# EAGLE board PT_2015_PB_MAIN_Rev1 (EAGLE 6.5.0)
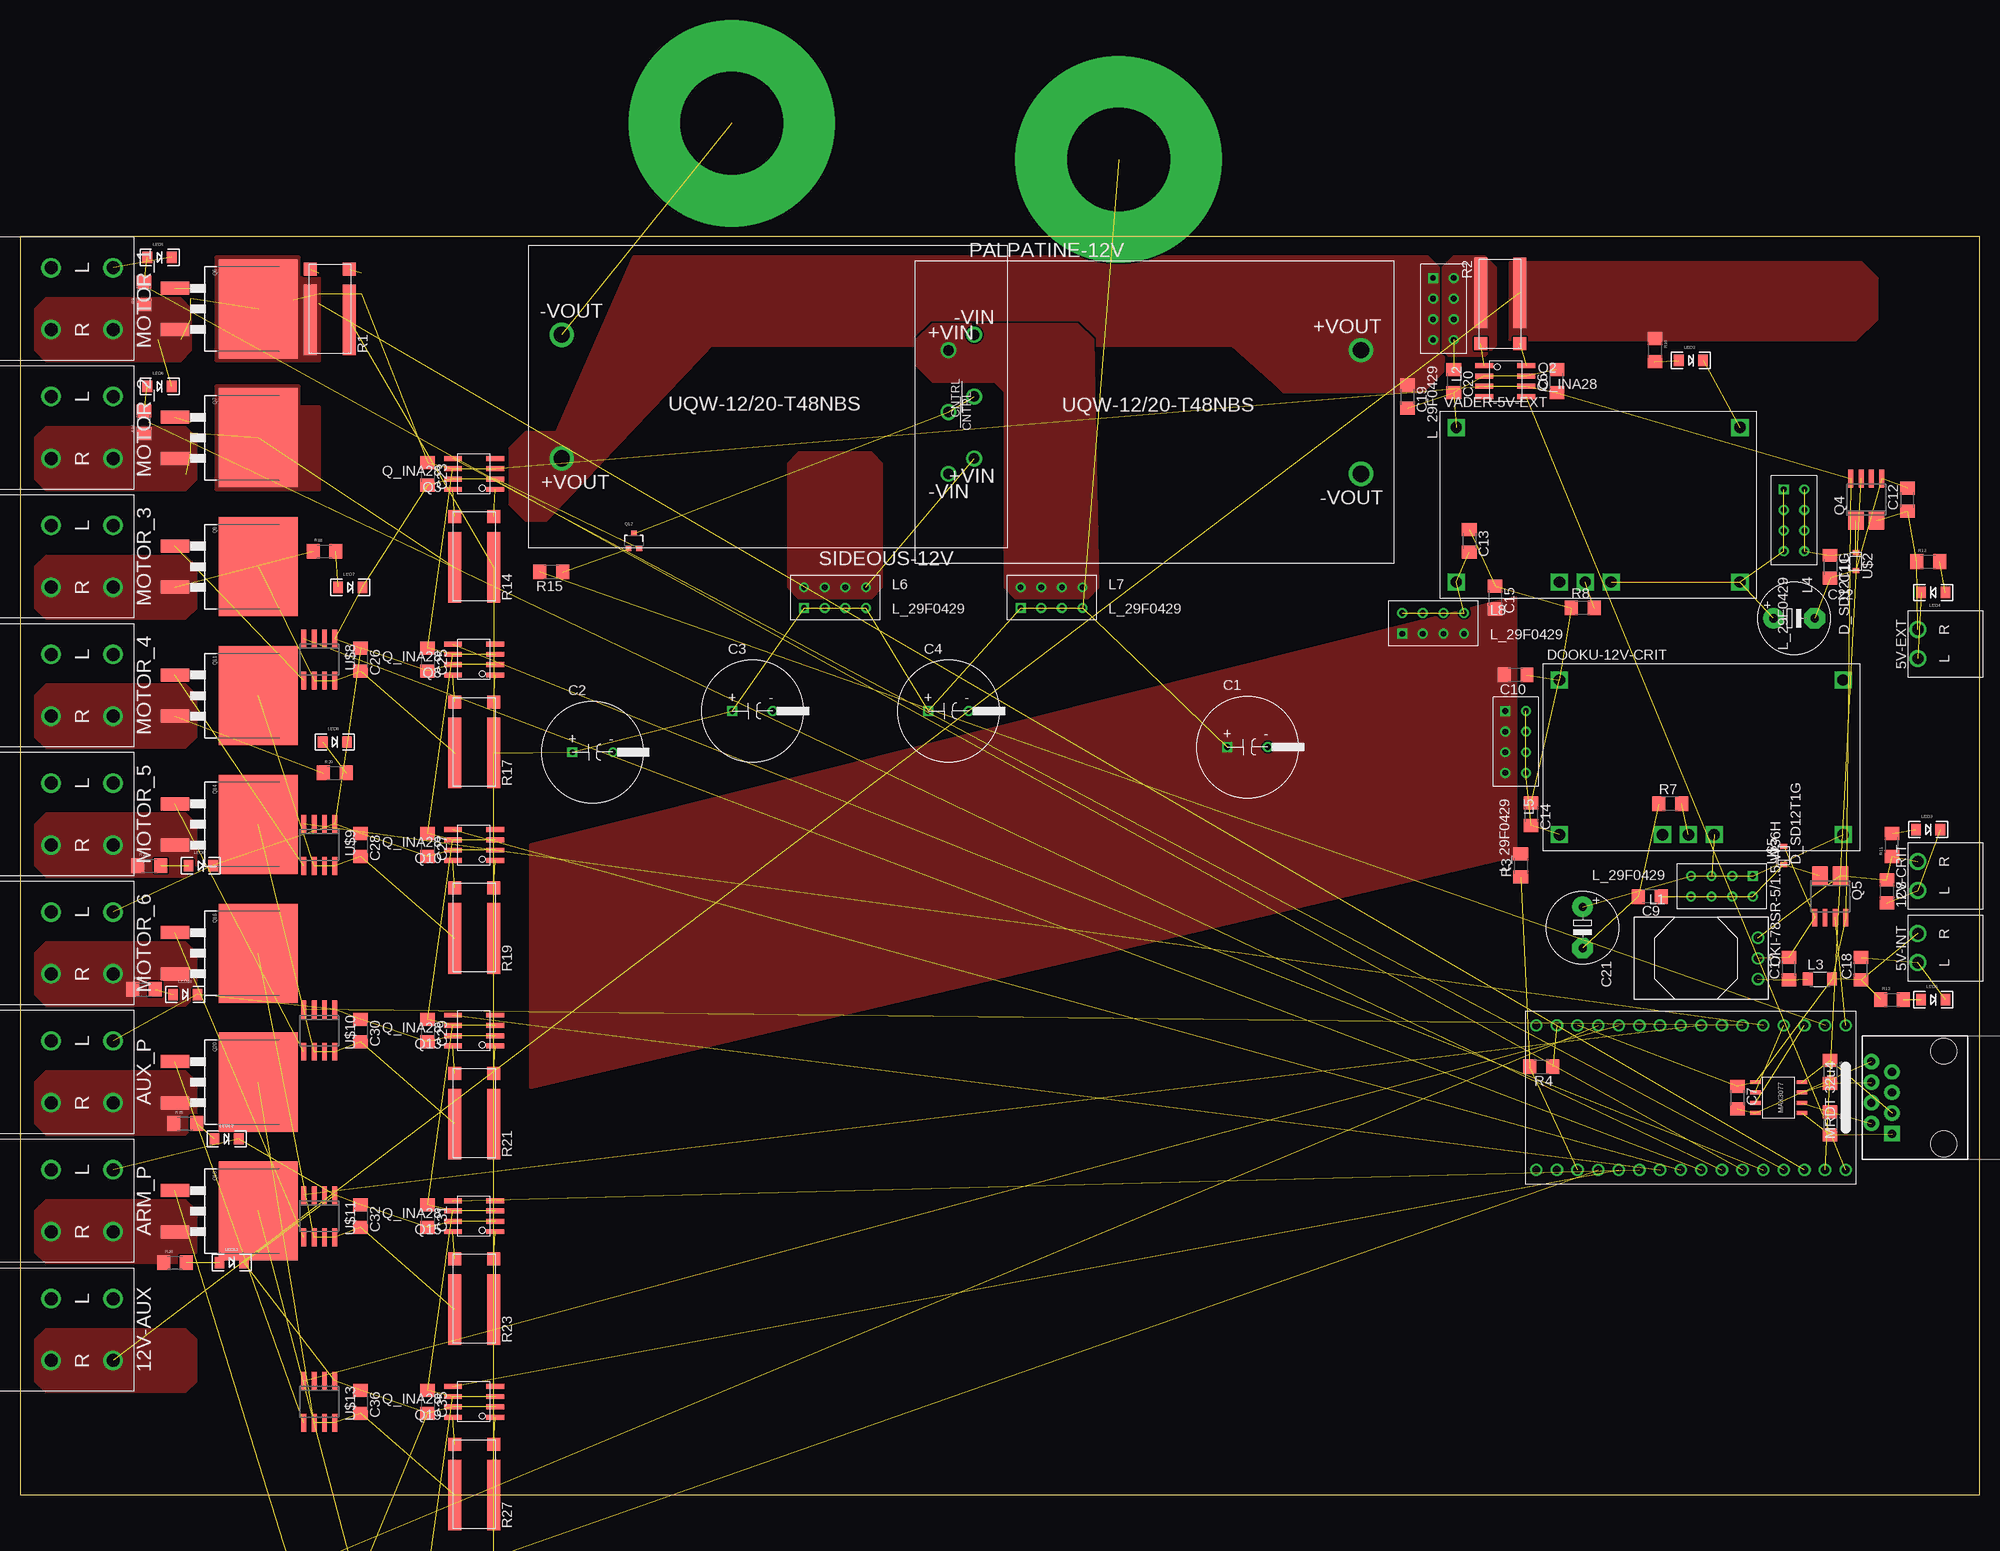
[diagram p0: board, top side]
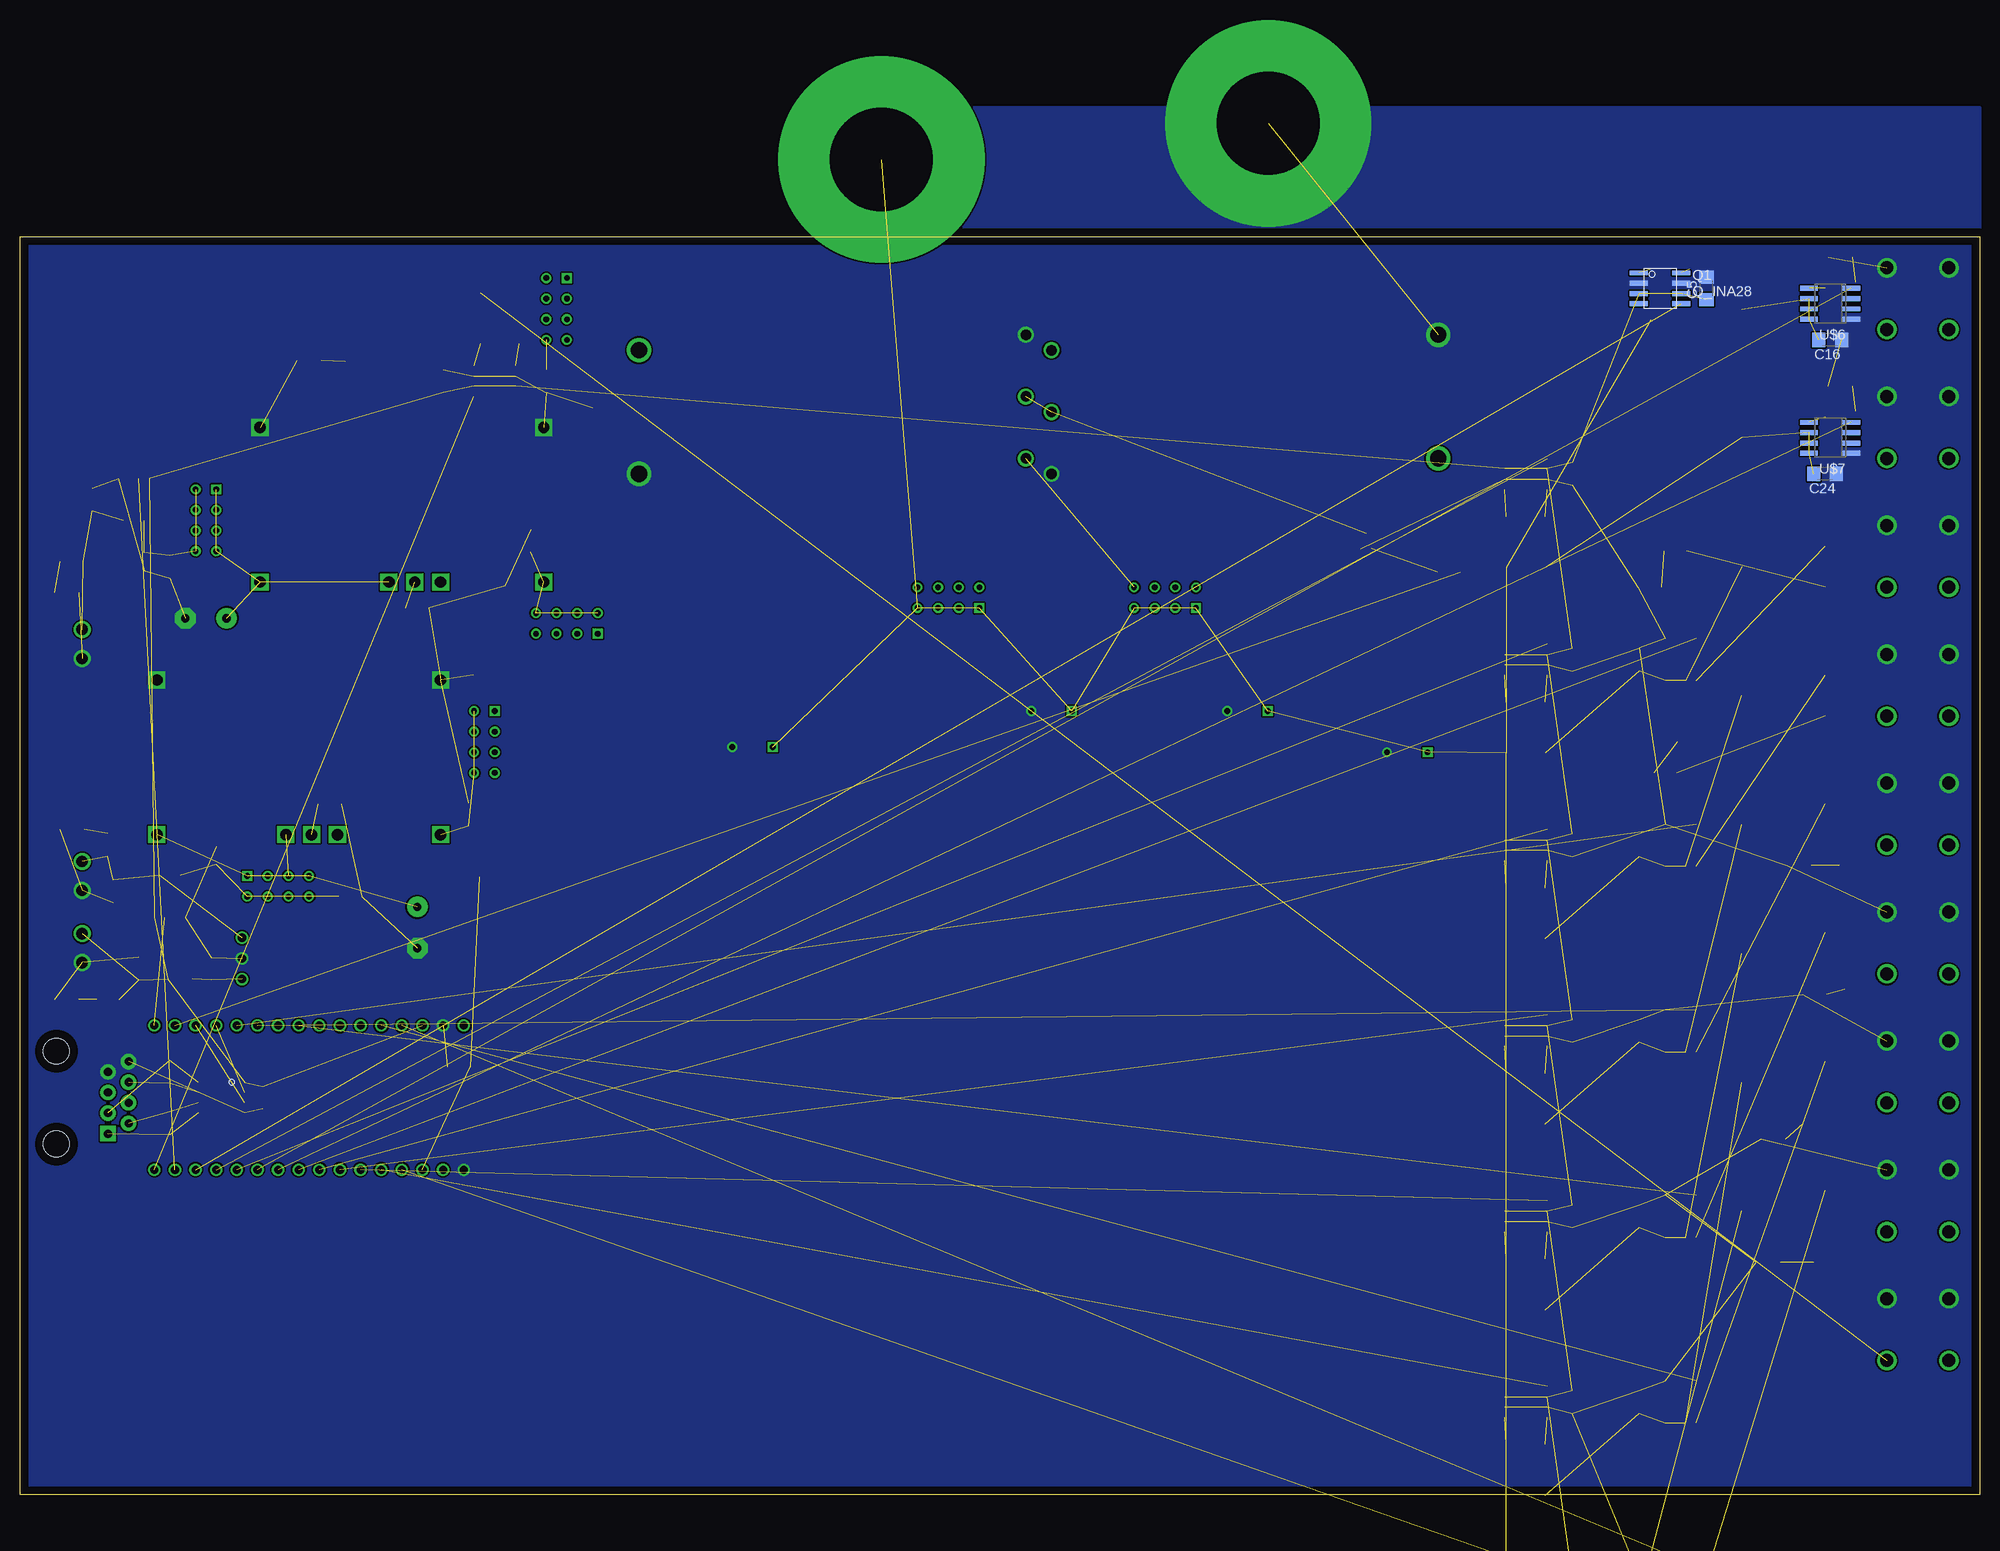
[diagram p1: board, bottom side, seen from below]

Size 241.3 x 154.94 mm. Coordinates in mm from the lower left corner, seen from the top.
Outline: 0,0 241.3,0 241.3,154.94 0,154.94 0,0
Copper layers (1*16): Top 0.035mm / dielectric 1.5mm / Bottom 0.035mm
Design rules "default *": minimum track width 10mil, minimum drill 13mil, track to track 8mil, track to pad 8mil, pad to pad 8mil, via to via 8mil, smd to smd 8mil, copper to edge 40mil, drill to drill 8mil, minimum pad ring 10mil, minimum via ring 8mil, stop-mask expansion 4mil, vias tented up to drill 0mil, thermal gap 10mil

## Footprints (pad centres in the part's own frame; a part is rotated, then mirrored left to right if it is on the bottom)
691322110002 = drill 1.4: L -1.79,0; R 1.79,0
20020618-M02 = drill 1.6: L1 -3.81,3.81; L2 -3.81,-3.81; R1 3.81,3.81; R2 3.81,-3.81
LARGE_TERMINAL_HOLE = drill 12.7 pad 25.4: P$1 0,0
C_12.5MM = drill 0.7 square: + -2.5,0 | drill 0.7: - 2.5,0
C1206 = smd 1.6 x 1.8: 1 -1.4,0; 2 1.4,0
E5-8,5 = drill 1.016 pad 2.54: + -2.54,0 | drill 1.016 pad 2.54 octagon: - 2.54,0
R_PDSS-T7 = drill 1.4 square: 1 -17.47,9.53; 2 -17.47,-9.52; 3 -4.77,-9.52; 4 -1.59,-9.52; 5 1.59,-9.52; 6 17.47,-9.52; 7 17.47,9.53
L_29F0429 = drill 0.7 square: 1 -3.81,-1.27 | drill 0.7: 2 -1.27,-1.27; 3 1.27,-1.27; 4 3.81,-1.27; 5 3.81,1.27; 6 1.27,1.27; 7 -1.27,1.27; 8 -3.81,1.27
L3216C = smd 1.2 x 1.6: 1 -1.5,0; 2 1.5,0
LED-1206 = smd 1.2 x 1.4: A -1.5,0; C 1.5,0
OKI-78SRH = drill 1.016: 1 2.54,0; 2 0,0; 3 -2.54,0
U-T48-QB-NO_TRIM = drill 1.3: 1 -25.4,7.62; 2 -25.4,0; 3 -25.4,-7.62 | drill 2: 4 25.4,-7.62; 8 25.4,7.62
SOIC8 = smd 2.2 x 0.6: 1 -2.6,1.905; 2 -2.6,0.635; 3 -2.6,-0.635; 4 -2.6,-1.905; 5 2.6,-1.905; 6 2.6,-0.635; 7 2.6,0.635; 8 2.6,1.905
SOIC8_ACS711 = smd 1.92 x 2.2: 1 -1.27,-2.6; 4 1.27,-2.6 | smd 0.6 x 2.2: 5 1.905,2.6; 6 0.635,2.6; 7 -0.635,2.6; 8 -1.905,2.6
D2PACK = smd 1.6 x 3.5: 1 -2.54,-8.275; 2 2.54,-8.275 | smd 12.2 x 9.75: TAB 0,2
SOT323 = smd 0.7 x 0.7: 1 -0.65,-0.925; 2 0.65,-0.925; 3 0,0.925
R_FC4L = smd 1.6 x 8.7: 1 2.4,-1.35; 2 -2.4,-1.35 | smd 1.6 x 1.6: SENSE1 2.4,4.9; SENSE2 -2.4,4.9
R1206 = smd 1.6 x 1.803: 1 -1.422,0; 2 1.422,0
1206 = smd 1.6 x 1.8: 1 -1.4,0; 2 1.4,0
32U4_MCU_DIP = drill 1: 1 -8.89,19.05; 2 -8.89,16.51; 3 -8.89,13.97; 4 -8.89,11.43; 5 -8.89,8.89; 6 -8.89,6.35; 7 -8.89,3.81; 8 -8.89,1.27; 9 -8.89,-1.27; 10 -8.89,-3.81; 11 -8.89,-6.35; 12 -8.89,-8.89; 13 -8.89,-11.43; 14 -8.89,-13.97; 15 -8.89,-16.51; 16 -8.89,-19.05; 17 8.89,-19.05; 18 8.89,-16.51; 19 8.89,-13.97; 20 8.89,-11.43; 21 8.89,-8.89; 22 8.89,-6.35; 23 8.89,-3.81; 24 8.89,-1.27; 25 8.89,1.27; 26 8.89,3.81; 27 8.89,6.35; 28 8.89,8.89; 29 8.89,11.43; 30 8.89,13.97; 31 8.89,16.51; 32 8.89,19.05
SOD-323 = smd 0.63 x 0.83: 1 -1.115,0; 2 1.115,0
MAX3070E = smd 0.49 x 1.3: A -1.905,2.857; B -0.635,2.857; DI 0.635,-2.857; GND 1.905,-2.857; RO -0.635,-2.857; VCC -1.905,-2.857; Y 1.905,2.857; Z 0.635,2.857
RJ45-8 = drill 1 pad 1.88 square: 1 -4.445,6.35 | drill 1 pad 1.88: 2 -3.175,8.89; 3 -1.905,6.35; 4 -0.635,8.89; 5 0.635,6.35; 6 1.905,8.89; 7 3.175,6.35; 8 4.445,8.89 | hole 3.2: -5.715,0; 5.715,0
SO8 = smd 0.6 x 2.2: 1 -1.905,-2.6; 2 -0.635,-2.6; 3 0.635,-2.6; 4 1.905,-2.6; 5 1.905,2.6; 6 0.635,2.6; 7 -0.635,2.6; 8 -1.905,2.6

## Placement (x,y rotation side)
5V-EXT  H_WR-TBL_321*0002HORIZ  [691322110002]  233.68,104.78 90 top
5V-INT  H_WR-TBL_321*0002HORIZ  [691322110002]  233.68,67.31 90 top
12V-AUX  H_20020618-M02  [20020618-M02]  7.62,20.32 270 top
12V-CRIT  H_WR-TBL_321*0002HORIZ  [691322110002]  233.68,76.2 90 top
ARM_P  H_20020618-M02  [20020618-M02]  7.62,36.2 270 top
AUX_P  H_20020618-M02  [20020618-M02]  7.62,52.07 270 top
BATT-NEG  TERMINAL_HOLE  [LARGE_TERMINAL_HOLE]  87.63,168.91 0 top  (outside the outline)
BATT-POS  TERMINAL_HOLE  [LARGE_TERMINAL_HOLE]  135.25,164.47 0 top  (outside the outline)
C1  1mF  [C_12.5MM]  151.13,92.08 0 top
C2  1mF  [C_12.5MM]  70.48,91.44 0 top
C3  1mF  [C_12.5MM]  90.17,96.52 0 top
C4  1mF  [C_12.5MM]  114.3,96.52 0 top
C5  .1µF  [C1206]  33.66,148.59 90 bottom
C6  .1µF  [C1206]  189.23,137.16 90 top
C7  1uF  [C1206]  211.46,48.9 270 top
C8  47µf  [C1206]  229.87,74.3 270 top
C9  [C1206]  200.66,73.66 180 top
C10  [C1206]  184.15,100.97 180 top
C11  [C1206]  222.88,114.3 270 top
C12  47µf  [C1206]  232.41,122.56 90 top
C13  2.2µF  [C1206]  178.44,117.47 270 top
C14  2.2µF  [C1206]  186.06,83.82 270 top
C15  [C1206]  181.61,110.49 270 top
C16  10µF  [C1206]  18.41,142.24 180 bottom
C17  47µF  [C1206]  217.81,64.77 90 top
C18  47µF  [C1206]  226.69,64.77 90 top
C19  [C1206]  170.81,135.25 270 top
C20  [C1206]  176.53,137.16 270 top
C21  330µF  [E5-8,5]  192.41,69.85 270 top
C22  330µF  [E5-8,5]  218.44,107.95 0 top
C23  .1µF  [C1206]  50.16,125.73 270 top
C24  10µF  [C1206]  19.05,125.73 180 bottom
C25  .1µF  [C1206]  50.16,102.87 270 top
C26  10µF  [C1206]  41.91,102.87 270 top
C27  .1µF  [C1206]  50.16,80.01 270 top
C28  10µF  [C1206]  41.91,80.01 270 top
C29  .1µF  [C1206]  50.16,57.15 270 top
C30  10µF  [C1206]  41.91,57.15 270 top
C31  .1µF  [C1206]  50.16,34.29 270 top
C32  10µF  [C1206]  41.91,34.29 270 top
C33  .1µF  [C1206]  50.16,-11.43 270 top  (outside the outline)
C34  10µF  [C1206]  41.91,-11.43 270 top  (outside the outline)
C35  .1µF  [C1206]  50.16,11.43 270 top
C36  10µF  [C1206]  41.91,11.43 270 top
DOOKU-12V-CRIT  Q_PTN78020WAH  [R_PDSS-T7]  207.01,90.81 0 top
L1  L_29F0429  [L_29F0429]  209.55,74.93 180 top
L2  L_29F0429  [L_29F0429]  175.26,146.05 270 top
L3  [L3216C]  221.62,63.5 0 top
L4  L_29F0429  [L_29F0429]  218.44,120.02 270 top
L5  L_29F0429  [L_29F0429]  184.15,92.71 270 top
L6  L_29F0429  [L_29F0429]  100.33,110.49 0 top
L7  L_29F0429  [L_29F0429]  127,110.49 0 top
L8  L_29F0429  [L_29F0429]  173.99,107.31 0 top
LED1  [LED-1206]  17.14,152.4 0 top
LED2  [LED-1206]  205.74,139.7 0 top
LED3  [LED-1206]  234.95,81.92 0 top
LED4  [LED-1206]  235.59,111.12 180 top
LED5  [LED-1206]  235.59,60.96 0 top
LED6  [LED-1206]  17.14,136.53 0 top
LED7  [LED-1206]  40.64,111.76 0 top
LED8  [LED-1206]  38.73,92.71 0 top
LED9  [LED-1206]  22.23,77.47 0 top
LED10  [LED-1206]  20.32,61.59 0 top
LED11  [LED-1206]  26.04,28.57 0 top
LED12  [LED-1206]  25.4,43.81 0 top
MOTOR_1  H_20020618-M02  [20020618-M02]  7.62,147.32 270 top
MOTOR_2  H_20020618-M02  [20020618-M02]  7.62,131.44 270 top
MOTOR_3  H_20020618-M02  [20020618-M02]  7.62,115.57 270 top
MOTOR_4  H_20020618-M02  [20020618-M02]  7.62,99.69 270 top
MOTOR_5  H_20020618-M02  [20020618-M02]  7.62,83.82 270 top
MOTOR_6  H_20020618-M02  [20020618-M02]  7.62,67.94 270 top
OKI-78SR-5/1.5-W36H  Q_OKI-78SR  [OKI-78SRH]  214,66.04 90 top
PALPATINE-12V  UQW-12/20-T48NBS  [U-T48-QB-NO_TRIM]  139.7,133.35 0 top
Q1  Q_INA28  [SOIC8]  39.37,148.59 0 bottom
Q2  Q_INA28  [SOIC8]  182.88,137.16 0 top
Q3  Q_INA28  [SOIC8]  55.88,125.73 180 top
Q4  Q_ACS711LC  [SOIC8_ACS711]  227.33,122.56 0 top
Q5  Q_ACS711LC  [SOIC8_ACS711]  222.88,73.66 180 top
Q6  Q_IRFS7437PbF  [D2PACK]  27.3,146.05 270 top
Q7  Q_IRFS7437PbF  [D2PACK]  27.3,130.18 270 top
Q8  Q_INA28  [SOIC8]  55.88,102.87 180 top
Q9  Q_IRFS7437PbF  [D2PACK]  27.3,114.3 270 top
Q10  Q_INA28  [SOIC8]  55.88,80.01 180 top
Q11  Q_IRFS7437PbF  [D2PACK]  27.3,98.42 270 top
Q12  2N7002  [SOT323]  75.56,117.47 0 top
Q13  Q_INA28  [SOIC8]  55.88,57.15 180 top
Q14  Q_IRFS7437PbF  [D2PACK]  27.3,82.55 270 top
Q15  Q_INA28  [SOIC8]  55.88,34.29 180 top
Q16  Q_IRFS7437PbF  [D2PACK]  27.3,66.67 270 top
Q17  Q_INA28  [SOIC8]  55.88,-11.43 180 top  (outside the outline)
Q18  Q_IRFS7437PbF  [D2PACK]  27.3,34.92 270 top
Q19  Q_INA28  [SOIC8]  55.88,11.43 180 top
Q20  Q_IRFS7437PbF  [D2PACK]  27.3,50.8 270 top
R1  .001Ω  [R_FC4L]  38.1,146.05 0 top
R2  [R_FC4L]  182.25,146.69 180 top
R3  70kΩ  [R1206]  184.78,77.47 90 top
R4  10kΩ  [R1206]  187.32,52.7 180 top
R5  120 Ohm  [1206]  222.88,52.07 270 top
R6  120 Ohm  [1206]  222.88,45.72 270 top
R7  585Ω  [R1206]  203.2,85.09 0 top
R8  21kΩ  [R1206]  192.41,109.22 0 top
R9  1kΩ  [1206]  15.24,147.96 90 top
R10  1kΩ  [1206]  201.29,140.97 270 top
R11  1kΩ  [1206]  230.5,80.01 90 top
R12  1kΩ  [1206]  234.95,114.94 0 top
R13  1kΩ  [1206]  230.5,60.96 0 top
R14  .001Ω  [R_FC4L]  55.88,115.57 0 top
R15  [R1206]  65.41,113.67 180 top
R16  1kΩ  [1206]  15.24,132.08 90 top
R17  .001Ω  [R_FC4L]  55.88,92.71 0 top
R18  1kΩ  [1206]  37.47,116.2 0 top
R19  .001Ω  [R_FC4L]  55.88,69.85 0 top
R20  1kΩ  [1206]  38.73,88.9 0 top
R21  .001Ω  [R_FC4L]  55.88,46.99 0 top
R22  1kΩ  [1206]  15.88,77.47 0 top
R23  .001Ω  [R_FC4L]  55.88,24.13 0 top
R24  1kΩ  [1206]  15.24,62.23 0 top
R25  .001Ω  [R_FC4L]  55.88,-21.59 0 top  (outside the outline)
R26  1kΩ  [1206]  19.05,28.57 0 top
R27  .001Ω  [R_FC4L]  55.88,1.27 0 top
R28  1kΩ  [1206]  20.32,45.72 0 top
SIDEOUS-12V  UQW-12/20-T48NBS  [U-T48-QB-NO_TRIM]  92.08,135.25 180 top
U$1  32U4_BREAKOUT  [32U4_MCU_DIP]  205.74,48.9 270 top
U$2  D_SD12T1G  [SOD-323]  226.06,114.94 270 top
U$3  MAX3077  [MAX3070E]  216.53,48.9 270 top
U$4  RJ45-8PTH  [RJ45-8]  236.85,48.9 90 top
U$5  D_SD12T1G  [SOD-323]  217.17,78.74 90 top
U$6  LT1910  [SO8]  18.41,146.69 90 bottom
U$7  LT1910  [SO8]  18.41,130.18 90 bottom
U$8  LT1910  [SO8]  36.83,102.87 180 top
U$9  LT1910  [SO8]  36.83,80.01 180 top
U$10  LT1910  [SO8]  36.83,57.15 180 top
U$11  LT1910  [SO8]  36.83,34.29 180 top
U$12  LT1910  [SO8]  36.83,-11.43 180 top  (outside the outline)
U$13  LT1910  [SO8]  36.83,11.43 180 top
VADER-5V-EXT  Q_PTN78020WAH  [R_PDSS-T7]  194.31,121.92 0 top

## Library data of the parts
5V-EXT 5V-INT 12V-CRIT = MRDT-2015-PowerBoard; DIGIKEY_PN: 732-2769-ND
12V-AUX ARM_P AUX_P BATT-NEG BATT-POS DOOKU-12V-CRIT MOTOR_1-MOTOR_6 OKI-78SR-5/1.5-W36H PALPATINE-12V Q4-Q7 Q9 Q11 Q14 Q16 Q18 Q20 SIDEOUS-12V VADER-5V-EXT = MRDT-2015-PowerBoard
C1-C4 L1 L2 L4-L8 Q1-Q3 Q8 Q10 Q13 Q15 Q17 Q19 R1 R2 R14 R17 R19 R21 R23 R25 R27 U$2 U$5 = MRDT-2014-All
C5-C36 L3 R3 R4 R7 R8 R15 = resistor
LED1-LED12 = SparkFun-LED
Q12 = SparkFun-DiscreteSemi; PROD_ID: TRANS-11151
R5 R6 R9-R13 R16 R18 R20 R22 R24 R26 R28 = SparkFun-Passives
U$1 = MRDT-2015-General
U$3 = MAX3077
U$4 = SparkFun-Connectors
U$6-U$13 = Jake

## Nets
5V-EXT: 5V-EXT.R C12.1 Q4.4 R12.1
5V-IMEAS: Q4.7 U$1.31
12V-AUX: 12V-AUX.R1 12V-AUX.R2 R2.2 R10.1
12V-CRIT: 12V-CRIT.R C8.1 OKI-78SR-5/1.5-W36H.1 Q5.1 R11.1
12V-IMEAS: Q2.5 U$1.32
12V-SIG: R15.2 U$1.2
+5V: 5V-INT.R C5.1 C6.1 C7.1 C18.1 C23.1 C25.1 C27.1 C29.1 C31.1 C33.1 C35.1 L3.2 Q1.3 Q1.6 Q2.3 Q2.6 Q3.3 Q3.6 Q4.8 Q5.8 Q8.3 Q8.6 Q10.3 Q10.6 Q13.3 Q13.6 Q15.3 Q15.6 Q17.3 Q17.6 Q19.3 Q19.6 R13.1 U$1.14 U$3.VCC
ARM_P-IMEAS: Q17.5 U$1.20
ARM_P-SIG: U$1.13 U$12.4
AUX_P-IMEAS: Q19.5 U$1.21
AUX_P-SIG: U$1.12 U$13.4
CRIT-IMEAS: Q5.7 U$1.1
GND: 5V-EXT.L 5V-INT.L 12V-AUX.L1 12V-AUX.L2 12V-CRIT.L ARM_P.L1 ARM_P.L2 AUX_P.L1 AUX_P.L2 BATT-NEG.P$1 C1.- C2.- C3.- C4.- C5.2 C6.2 C7.2 C8.2 C9.2 C10.1 C11.2 C12.2 C13.1 C14.1 C15.1 C16.1 C17.2 C18.2 C19.2 C20.2 C21.- C22.- C23.2 C24.1 C25.2 C26.1 C27.2 C28.1 C29.2 C30.1 C31.2 C32.1 C33.2 C34.1 C35.2 C36.1 DOOKU-12V-CRIT.1 DOOKU-12V-CRIT.7 LED1.C LED2.C LED3.C LED4.C LED5.C LED6.C LED7.C LED8.C LED9.C LED10.C LED11.C LED12.C MOTOR_1.L1 MOTOR_1.L2 MOTOR_2.L1 MOTOR_2.L2 MOTOR_3.L1 MOTOR_3.L2 MOTOR_4.L1 MOTOR_4.L2 MOTOR_5.L1 MOTOR_5.L2 MOTOR_6.L1 MOTOR_6.L2 OKI-78SR-5/1.5-W36H.2 PALPATINE-12V.3 PALPATINE-12V.4 Q1.2 Q1.7 Q2.2 Q2.7 Q3.2 Q3.7 Q4.5 Q5.5 Q8.2 Q8.7 Q10.2 Q10.7 Q12.2 Q13.2 Q13.7 Q15.2 Q15.7 Q17.2 Q17.7 Q19.2 Q19.7 R4.1 R7.1 R8.1 SIDEOUS-12V.3 SIDEOUS-12V.4 U$1.15 U$1.17 U$2.2 U$3.GND U$4.7 U$4.8 U$5.2 U$6.1 U$7.1 U$8.1 U$9.1 U$10.1 U$11.1 U$12.1 U$13.1 VADER-5V-EXT.1 VADER-5V-EXT.7
M1-IMEAS: Q1.5 U$1.30
M1-SIG: U$1.27 U$6.4
M2-IMEAS: Q3.5 U$1.29
M2-SIG: U$1.26 U$7.4
M3-IMEAS: Q8.5 U$1.28
M3-SIG: U$1.25 U$8.4
M4-IMEAS: Q10.5 U$1.24
M4-SIG: U$1.5 U$9.4
M5-IMEAS: Q13.5 U$1.23
M5-SIG: U$1.6 U$10.4
M6-IMEAS: Q15.5 U$1.22
M6-SIG: U$1.8 U$11.4
N$1: Q1.8 R1.SENSE2
N$2: Q1.1 R1.SENSE1
N$3: C13.2 L8.5 L8.6 L8.7 L8.8 VADER-5V-EXT.2
N$4: PALPATINE-12V.2 Q12.3 SIDEOUS-12V.2
N$5: L7.5 L7.6 L7.7 L7.8 PALPATINE-12V.1
N$6: L6.5 L6.6 L6.7 L6.8 SIDEOUS-12V.1
N$7: C19.1 L2.1 L2.2 L2.3 L2.4 PALPATINE-12V.8 SIDEOUS-12V.8
N$8: C14.2 DOOKU-12V-CRIT.2 L5.5 L5.6 L5.7 L5.8
N$9: DOOKU-12V-CRIT.4 R7.2
N$10: C9.1 L1.5 L1.6 L1.7 L1.8 Q5.4 U$5.1
N$11: C20.1 L2.5 L2.6 L2.7 L2.8 R2.1
N$12: Q2.8 R2.SENSE2
N$13: Q2.1 R2.SENSE1
N$14: R6.2 U$3.Y U$4.1
N$15: C22.+ L4.1 L4.2 L4.3 L4.4 VADER-5V-EXT.5 VADER-5V-EXT.6
N$16: C11.1 L4.5 L4.6 L4.7 L4.8 Q4.1 U$2.1
N$18: R6.1 U$3.Z U$4.2
N$19: R5.2 U$3.B U$4.6
N$20: R5.1 U$3.A U$4.3
N$21: U$1.3 U$3.DI
N$26: Q3.8 R14.SENSE2
N$27: Q3.1 R14.SENSE1
N$28: C24.2 Q7.TAB R14.2 U$7.6 U$7.8
N$29: MOTOR_2.R1 MOTOR_2.R2 Q7.2 R16.1
N$30: Q7.1 U$7.5
N$31: LED6.A R16.2
N$32: Q8.8 R17.SENSE2
N$35: R8.2 VADER-5V-EXT.4
N$36: C21.+ DOOKU-12V-CRIT.5 DOOKU-12V-CRIT.6 L1.1 L1.2 L1.3 L1.4
N$39: LED1.A R9.2
N$40: C16.2 Q6.TAB R1.2 U$6.6 U$6.8
N$41: MOTOR_1.R1 MOTOR_1.R2 Q6.2 R9.1
N$42: Q6.1 U$6.5
N$43: Q8.1 R17.SENSE1
N$44: C26.2 Q9.TAB R17.2 U$8.6 U$8.8
N$45: MOTOR_3.R1 MOTOR_3.R2 Q9.2 R18.1
N$46: LED2.A R10.2
N$47: Q9.1 U$8.5
N$48: LED3.A R11.2
N$49: LED7.A R18.2
N$50: LED4.A R12.2
N$51: Q10.8 R19.SENSE2
N$52: LED5.A R13.2
N$53: Q10.1 R19.SENSE1
N$54: C28.2 Q11.TAB R19.2 U$9.6 U$9.8
N$55: MOTOR_4.R1 MOTOR_4.R2 Q11.2 R20.1
N$56: Q11.1 U$9.5
N$57: LED8.A R20.2
N$58: Q13.8 R21.SENSE2
N$59: Q13.1 R21.SENSE1
N$60: C30.2 Q14.TAB R21.2 U$10.6 U$10.8
N$61: MOTOR_5.R1 MOTOR_5.R2 Q14.2 R22.1
N$62: Q14.1 U$10.5
N$63: LED9.A R22.2
N$64: Q15.8 R23.SENSE2
N$65: Q15.1 R23.SENSE1
N$66: C32.2 Q16.TAB R23.2 U$11.6 U$11.8
N$67: MOTOR_6.R1 MOTOR_6.R2 Q16.2 R24.1
N$68: Q16.1 U$11.5
N$69: LED10.A R24.2
N$70: Q17.8 R25.SENSE2
N$71: Q17.1 R25.SENSE1
N$72: C34.2 Q18.TAB R25.2 U$12.6 U$12.8
N$73: ARM_P.R1 ARM_P.R2 Q18.2 R26.1
N$74: Q18.1 U$12.5
N$75: LED11.A R26.2
N$76: Q19.8 R27.SENSE2
N$77: Q19.1 R27.SENSE1
N$78: C36.2 Q20.TAB R27.2 U$13.6 U$13.8
N$79: AUX_P.R1 AUX_P.R2 Q20.2 R28.1
N$80: Q20.1 U$13.5
N$81: LED12.A R28.2
N$100: C17.1 L3.1 OKI-78SR-5/1.5-W36H.3
N$114: Q12.1 R15.1
PRIMARY-VMEAS: R3.1 R4.2 U$1.19
RXD: U$1.4 U$3.RO
V_BATT: BATT-POS.P$1 C1.+ C2.+ C3.+ C4.+ C10.2 C15.2 L5.1 L5.2 L5.3 L5.4 L6.1 L6.2 L6.3 L6.4 L7.1 L7.2 L7.3 L7.4 L8.1 L8.2 L8.3 L8.4 R1.1 R3.2 R14.1 R17.1 R19.1 R21.1 R23.1 R25.1 R27.1

## Tracks (layer width: path | path; a pad name or v marks a point on that pad's centre or on a via)
5V-EXT  (3 unrouted)
5V-IMEAS  (1 unrouted)
12V-AUX  (1 unrouted)
  pour Top (no thermals): 226.69,151.76 183.51,151.76 183.51,142.24 226.06,142.24 228.6,144.78 228.6,149.86
  pour Top (no thermals): 21.59,19.05 21.59,13.97 20.32,12.7 3.17,12.7 1.91,13.97 1.91,19.05 3.17,20.32 20.32,20.32
12V-CRIT  (4 unrouted)
12V-IMEAS  (1 unrouted)
12V-SIG  (1 unrouted)
+5V  (35 unrouted)
ARM_P-IMEAS  (1 unrouted)
ARM_P-SIG  (1 unrouted)
AUX_P-IMEAS  (1 unrouted)
AUX_P-SIG  (1 unrouted)
CRIT-IMEAS  (1 unrouted)
GND  (71 unrouted)
  pour Bottom (no thermals): 241.3,170.81 0,170.81 0,0 241.3,0
M1-IMEAS  (1 unrouted)
M1-SIG  (1 unrouted)
M2-IMEAS  (1 unrouted)
M2-SIG  (1 unrouted)
M3-IMEAS  (1 unrouted)
M3-SIG  (1 unrouted)
M4-IMEAS  (1 unrouted)
M4-SIG  (1 unrouted)
M5-IMEAS  (1 unrouted)
M5-SIG  (1 unrouted)
M6-IMEAS  (1 unrouted)
M6-SIG  (1 unrouted)
N$1  (1 unrouted)
N$2  (1 unrouted)
N$3  (5 unrouted)
N$4  (2 unrouted)
N$5
  pour Top (no thermals): 121.28,135.89 121.28,111.76 122.56,110.49 131.44,110.49 132.72,111.76 132.08,142.24 130.18,144.15 112.39,144.15 110.49,142.24 110.49,139.06 112.39,137.16 120.02,137.16
N$6  (1 unrouted)
  pour Top (no thermals): 94.61,127 94.61,111.76 95.89,110.49 104.78,110.49 106.05,111.76 106.05,127 104.78,128.27 95.89,128.27
N$7
  pour Top (rank 3, no thermals): 60.33,128.91 60.33,121.92 62.23,120.02 64.77,120.02 85.09,141.6 149.22,141.6 154.94,136.53 155.57,135.89 172.72,135.89 175.26,138.43 175.26,150.5 173.35,152.4 75.56,152.4 66.04,130.81 62.23,130.81
N$8  (5 unrouted)
N$9  (1 unrouted)
N$10  (6 unrouted)
N$11  (1 unrouted)
  pour Top (no thermals): 176.53,152.4 175.26,151.13 175.26,140.97 175.9,140.34 180.34,140.34 181.61,141.6 181.61,151.13 180.34,152.4
N$12  (1 unrouted)
N$13  (1 unrouted)
N$14  (2 unrouted)
N$15  (6 unrouted)
N$16  (6 unrouted)
N$18  (2 unrouted)
N$19  (2 unrouted)
N$20  (2 unrouted)
N$21  (1 unrouted)
N$26  (1 unrouted)
N$27  (1 unrouted)
N$28  (4 unrouted)
  pour Top (no thermals): 34.29,136.53 24.13,136.53 24.13,123.83 36.83,123.83 36.83,133.99 34.29,133.99
N$29
  pour Top (no thermals): 21.59,130.18 21.59,125.09 20.32,123.83 3.17,123.83 1.91,125.09 1.91,130.18 3.17,131.44 20.32,131.44
N$30  (1 unrouted)
N$31  (1 unrouted)
N$32  (1 unrouted)
N$35  (1 unrouted)
N$36  (6 unrouted)
N$39  (1 unrouted)
N$40  (3 unrouted)
  pour Top (no thermals): 34.29,152.4 24.13,152.4 24.13,139.7 36.83,139.7 36.83,149.86 34.29,149.86
  pour Top (no thermals): 34.29,152.4 24.13,152.4 24.13,139.7 36.83,139.7 36.83,149.86 34.29,149.86
N$41
  pour Top (no thermals): 20.95,146.05 20.95,140.97 19.68,139.7 3.17,139.7 1.91,140.97 1.91,146.05 3.17,147.32 19.68,147.32
N$42  (1 unrouted)
N$43  (1 unrouted)
N$44  (4 unrouted)
N$45  (1 unrouted)
  pour Top (no thermals): 21.59,114.3 21.59,109.22 20.32,107.95 3.17,107.95 1.91,109.22 1.91,114.3 3.17,115.57 20.32,115.57
N$46  (1 unrouted)
N$47  (1 unrouted)
N$48  (1 unrouted)
N$49  (1 unrouted)
N$50  (1 unrouted)
N$51  (1 unrouted)
N$52  (1 unrouted)
N$53  (1 unrouted)
N$54  (4 unrouted)
N$55  (1 unrouted)
  pour Top (no thermals): 21.59,98.42 21.59,93.34 20.32,92.08 3.17,92.08 1.91,93.34 1.91,98.42 3.17,99.69 20.32,99.69
N$56  (1 unrouted)
N$57  (1 unrouted)
N$58  (1 unrouted)
N$59  (1 unrouted)
N$60  (4 unrouted)
N$61
  pour Top (no thermals): 21.59,82.55 21.59,77.47 20.32,76.2 3.17,76.2 1.91,77.47 1.91,82.55 3.17,83.82 20.32,83.82
N$62  (1 unrouted)
N$63  (1 unrouted)
N$64  (1 unrouted)
N$65  (1 unrouted)
N$66  (4 unrouted)
N$67
  pour Top (no thermals): 21.59,66.67 21.59,61.59 20.32,60.33 3.17,60.33 1.91,61.59 1.91,66.67 3.17,67.94 20.32,67.94
N$68  (1 unrouted)
N$69  (1 unrouted)
N$70  (1 unrouted)
N$71  (1 unrouted)
N$72  (4 unrouted)
N$73
  pour Top (no thermals): 21.59,34.92 21.59,29.84 20.32,28.57 3.17,28.57 1.91,29.84 1.91,34.92 3.17,36.2 20.32,36.2
N$74  (1 unrouted)
N$75  (1 unrouted)
N$76  (1 unrouted)
N$77  (1 unrouted)
N$78  (4 unrouted)
N$79
  pour Top (no thermals): 21.59,50.8 21.59,45.72 20.32,44.45 3.17,44.45 1.91,45.72 1.91,50.8 3.17,52.07 20.32,52.07
N$80  (1 unrouted)
N$81  (1 unrouted)
N$100  (2 unrouted)
N$114  (1 unrouted)
PRIMARY-VMEAS  (2 unrouted)
RXD  (1 unrouted)
V_BATT  (20 unrouted)
  pour Top (rank 2, no thermals): 184.15,110.49 62.87,80.01 62.87,50.16 184.15,78.74